# EAGLE board LCMeter-LCD4BitDirect-18F2550-CMP-NoRelay (EAGLE 7.6.0)
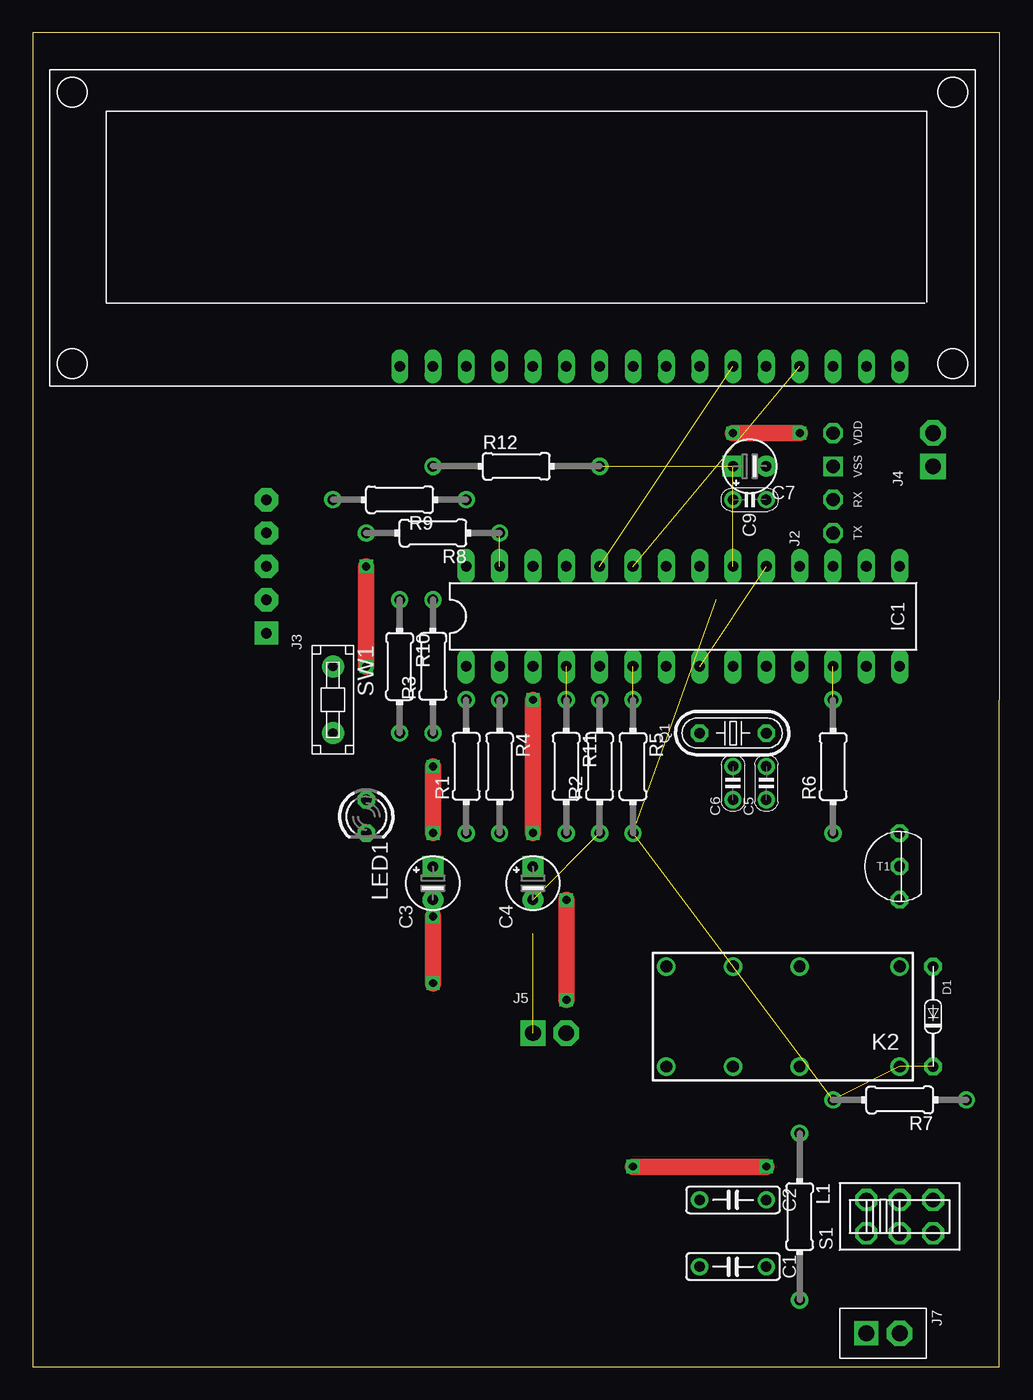
[diagram p0: board, top side]
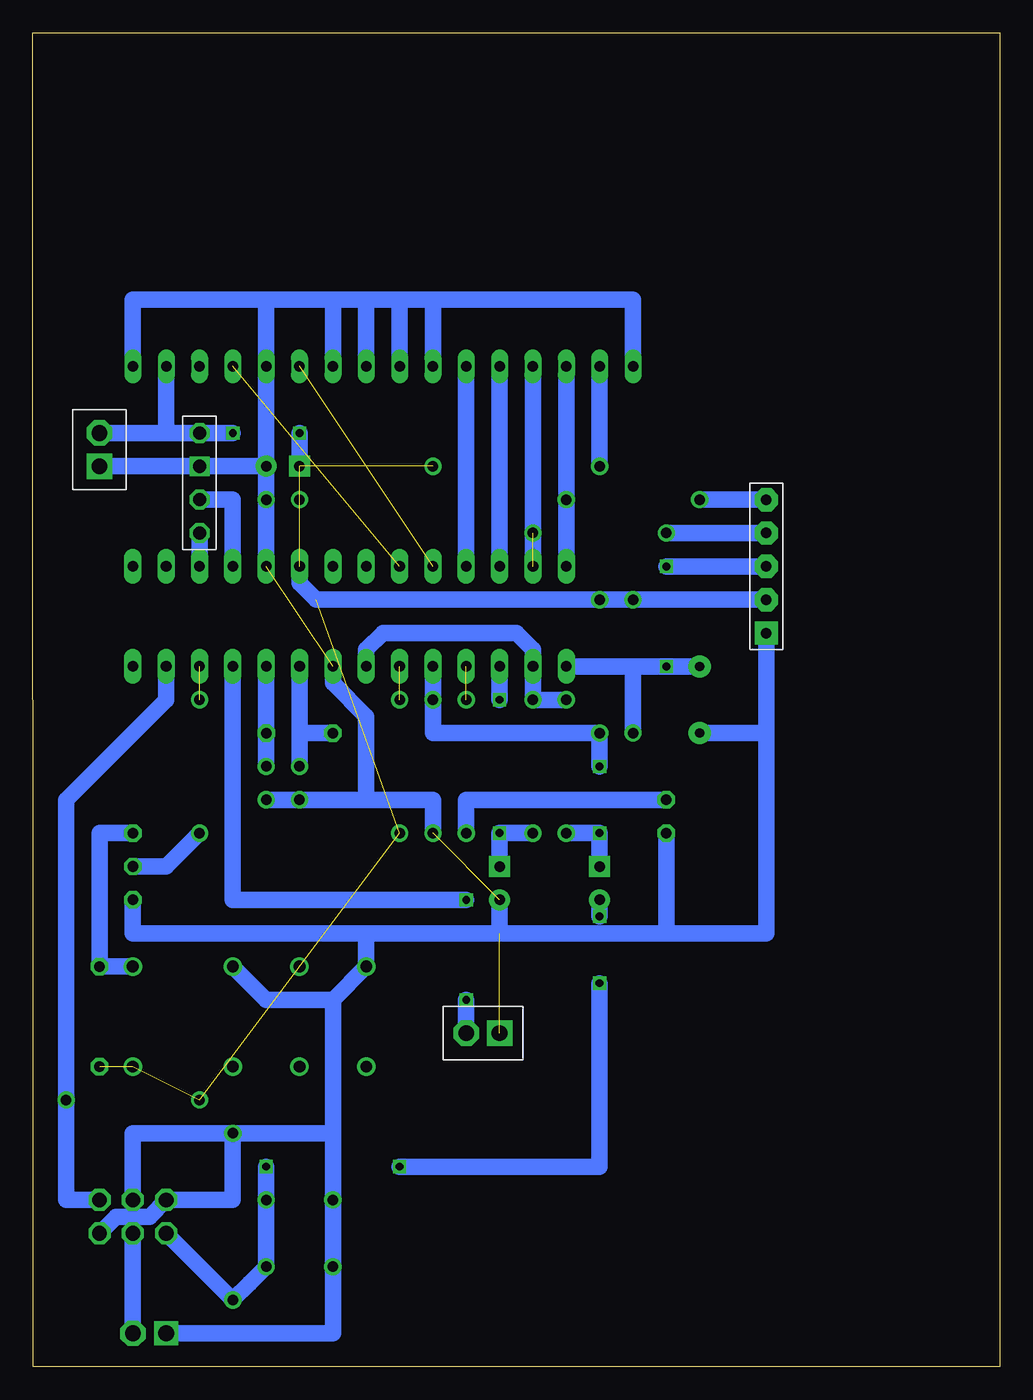
[diagram p1: board, bottom side, seen from below]

Size 73.66 x 101.6 mm. Coordinates in mm from the lower left corner, seen from the top.
Outline: 0,0 73.64,0 73.66,101.6 0,101.6 0,0
Copper layers (1*16): Top 0.035mm / dielectric 1.5mm / Bottom 0.035mm
Design rules "default": minimum track width 10mil, minimum drill 24mil, track to track 8mil, track to pad 8mil, pad to pad 8mil, via to via 8mil, smd to smd 8mil, copper to edge 40mil, drill to drill 8mil, minimum pad ring 10mil, minimum via ring 8mil, stop-mask expansion 4mil, vias tented up to drill 0mil, thermal gap 10mil
Net classes: 0 default: width 0.61 mm

## Footprints (pad centres in the part's own frame; a part is rotated, then mirrored left to right if it is on the bottom)
C050-025X060 = drill 0.8: 1 0,2.54; 2 0,-2.54
E2,5-4 = drill 0.8 pad 1.6 square: + 1.27,0 | drill 0.8 pad 1.6: - -1.27,0
C025-020X036 = drill 0.8: 1 -1.27,0; 2 1.27,0
C025-020X036/V = drill 0.8: 1 0,-1.27; 2 0,1.27
DO34-7 = drill 0.813 octagon: A 3.81,0; C -3.81,0
DIL28-3/V = drill 0.813 long: 1 -3.81,16.51; 2 -3.81,13.97; 3 -3.81,11.43; 4 -3.81,8.89; 5 -3.81,6.35; 6 -3.81,3.81; 7 -3.81,1.27; 8 -3.81,-1.27; 9 -3.81,-3.81; 10 -3.81,-6.35; 11 -3.81,-8.89; 12 -3.81,-11.43; 13 -3.81,-13.97; 14 -3.81,-16.51; 15 3.81,-16.51; 16 3.81,-13.97; 17 3.81,-11.43; 18 3.81,-8.89; 19 3.81,-6.35; 20 3.81,-3.81; 21 3.81,-1.27; 22 3.81,1.27; 23 3.81,3.81; 24 3.81,6.35; 25 3.81,8.89; 26 3.81,11.43; 27 3.81,13.97; 28 3.81,16.51
PIC-UART = drill 1 octagon: 17 0,0; 18 0,2.54; 20 0,7.62 | drill 1 square: 19 0,5.08
PIC-ICSP = drill 0.8 pad 1.778 square: 1 -5.08,0 | drill 0.8 pad 1.778 octagon: 2 -2.54,0; 3 0,0; 4 2.54,0; 5 5.08,0
CONN-2P = drill 1.2 pad 1.93 square: 1 -1.27,0 | drill 1.2 pad 1.93 octagon: 2 1.27,0
CONN-2P-V = drill 1.2 pad 1.778 square: 1 0,-1.27 | drill 1.2 pad 1.93 octagon: 2 0,1.27
DS2Y = drill 0.9: 1 -8.89,-3.81; 4 -1.27,-3.81; 6 3.81,-3.81; 8 8.89,-3.81; 9 8.89,3.81; 11 3.81,3.81; 13 -1.27,3.81; 16 -8.89,3.81
0204/12 = drill 0.8: 1 -6.35,0; 2 6.35,0
LM016L-HD44780 = drill 0.8 long: 1 29.21,-12.7; 2 26.67,-12.7; 3 24.13,-12.7; 4 21.59,-12.7; 5 19.05,-12.7; 6 16.51,-12.7; 7 13.97,-12.7; 8 11.43,-12.7; 9 8.89,-12.7; 10 6.35,-12.7; 11 3.81,-12.7; 12 1.27,-12.7; 13 -1.27,-12.7; 14 -3.81,-12.7; 15 -6.35,-12.7; 16 -8.89,-12.7
LED3MM = drill 0.813 octagon: A -1.27,0; K 1.27,0
HC49 = drill 0.813 octagon: 1 0,-2.54; 2 0,2.54
0204/10 = drill 0.8: 1 -5.08,0; 2 5.08,0
0204/10-V = drill 0.8: 1 0,5.08; 2 0,-5.08
SLSW-2P2T = drill 1.118 pad 1.524 octagon: 1 -1.27,2.54; 2 -1.27,0; 3 -1.27,-2.54; 4 1.27,2.54; 5 1.27,0; 6 1.27,-2.54
PB-1P1T = drill 0.7 pad 1.676: 1 2.54,0; 2 -2.54,0
TO92 = drill 0.813 octagon: 1 -2.54,0; 2 0,0; 3 2.54,0

## Placement (x,y rotation side)
C1  1nF  [C050-025X060]  53.34,7.62 270 top
C2  1nF  [C050-025X060]  53.34,12.7 270 top
C3  10μF  [E2,5-4]  30.48,36.83 90 top
C4  10μF  [E2,5-4]  38.1,36.83 90 top
C5  15pF  [C025-020X036]  55.88,44.45 90 top
C6  15pF  [C025-020X036]  53.34,44.45 90 top
C7  100μF  [E2,5-4]  54.61,68.58 180 top
C9  100nF  [C025-020X036/V]  54.61,66.04 90 top
D1  1N4148  [DO34-7]  68.58,26.67 90 top
IC1  PIC18F2550-I/SP-COMP-B-V  [DIL28-3/V]  49.53,57.15 90 top
J2  PIC-UART  [PIC-UART]  60.96,63.5 0 top
J3  PIC-ICSP  [PIC-ICSP]  17.78,60.96 90 top
J4  PWR  [CONN-2P]  68.58,69.85 90 top
J5  FREQ  [CONN-2P]  39.37,25.4 0 top
J7  TEST-LC  [CONN-2P-V]  64.77,2.54 270 top
K2  DS2Y  [DS2Y]  57.15,26.67 180 top
L1  82μH  [0204/12]  58.42,11.43 270 top
LCD  HD44780LM016L  [LM016L-HD44780]  36.83,88.9 0 top
LED1  TLLG4400  [LED3MM]  25.4,41.91 270 top
Q1  20MHz  [HC49]  53.34,48.26 90 top
R1  100k  [0204/10]  33.02,45.72 90 top
R2  100k  [0204/10]  43.18,45.72 90 top
R3  100k  [0204/10]  30.48,53.34 90 top
R4  47k  [0204/10-V]  35.56,45.72 180 top
R5  4.7k  [0204/10]  45.72,45.72 270 top
R6  10k  [0204/10-V]  60.96,45.72 0 top
R7  10k  [0204/10-V]  66.04,20.32 90 top
R8  100  [0204/10-V]  30.48,63.5 90 top
R9  100  [0204/10-V]  27.94,66.04 90 top
R10  4.7k  [0204/10]  27.94,53.34 270 top
R11  1k  [0204/10-V]  40.64,45.72 180 top
R12  330  [0204/12]  36.83,68.58 0 top
S1  SL-SW-2P-2T  [SLSW-2P2T]  66.04,11.43 90 top
SW1  PB-1P-1T  [PB-1P1T]  22.86,50.8 270 top
T1  2N3904  [TO92]  66.04,38.1 90 top

## Library data of the parts
C1-C7 C9 = c
D1 = d
IC1 = mcu
J2-J5 J7 = pinconn
K2 = relay; MPN: DS2Y-S-DC5V; OC_FARNELL: unknown; OC_NEWARK: 13P3268
L1 R1-R12 = r
LCD = lcd
LED1 = led; MF: VISHAY SEMICONDUCTOR; OC_FARNELL: 1612435
Q1 = q
S1 SW1 = sw
T1 = t

## Nets
/LC: IC1.13 R7.2 S1.6
/MCLR: IC1.1 J3.3 R10.2 SW1.2
/RELAY: IC1.12 R6.1
/RX: IC1.18 J2.18
/TX: IC1.17 J2.17
A0: IC1.2 IC1.7 R1.2 R4.2
A1: C4.+ IC1.3 R4.1
A3: C3.+ IC1.5 R1.1 R2.2 R3.1
A4: IC1.6 R5.1
C2_CON: C2.2 K2.4
D4: IC1.25 LCD.11
D5: IC1.26 LCD.12
D6: IC1.27 LCD.13 R8.2
D7: IC1.28 LCD.14 R9.2
E: IC1.24 LCD.6
FREQ: IC1.11 J5.2
GND: C1.2 C4.- C5.1 C6.1 C7.- C9.1 IC1.8 IC1.19 J2.19 J3.1 J4.1 J5.1 J7.1 K2.8 LCD.1 LCD.5 LCD.7 LCD.8 LCD.9 LCD.10 LCD.16 LED1.K R2.1 S1.5 SW1.1 T1.1
IN+: J7.2 S1.2
N$1: LED1.A R11.1
N$2: C1.1 C2.1 C3.- L1.2 S1.1
N$3: IC1.4 R11.2
N$5: LCD.15 R12.1
N$6: R6.2 T1.2
N$7: L1.1 S1.3 S1.4
N$8: D1.A K2.1 T1.3
OSC1: C6.2 IC1.9 Q1.2
OSC2: C5.2 IC1.10 Q1.1
PGC: J3.4 R8.1
PGD: J3.5 R9.1
RS: IC1.23 LCD.4
VCC: C7.+ C9.2 D1.C IC1.20 J2.20 J3.2 J4.2 K2.16 LCD.2 R3.2 R5.2 R7.1 R10.1 R12.2

## Tracks (layer width: path | path; a pad name or v marks a point on that pad's centre or on a via)
/LC
  Bottom 1.27: IC1.13 63.5,50.8 71.12,43.18 R7.2 71.12,12.7 S1.6
/MCLR  (via drill 0.6)
  Top 1.27: v25.4,53.34 v25.4,60.96
  Bottom 1.27: IC1.1 27.94,53.34 | 27.94,53.34 R10.2 | v25.4,60.96 J3.3 | SW1.2 v25.4,53.34 27.94,53.34
/RELAY  (1 unrouted)
/RX
  Bottom 1.27: IC1.18 58.42,66.04 J2.18
/TX
  Bottom 1.27: J2.17 IC1.17
A0
  Bottom 1.27: IC1.7 48.26,54.61 46.99,55.88 36.83,55.88 35.56,54.61 IC1.2 R4.2 R1.2
A1  (via drill 0.6)
  Top 1.27: v38.1,50.8 v38.1,40.64
  Bottom 1.27: IC1.3 v38.1,50.8 | R4.1 v38.1,40.64 C4.+
A3  (via drill 0.6)
  Top 1.27: v30.48,45.72 v30.48,40.64
  Bottom 1.27: IC1.5 R2.2 43.18,48.26 R3.1 v30.48,45.72 | R1.1 v30.48,40.64 C3.+
A4  (1 unrouted)
C2_CON
  Bottom 1.27: C2.2 50.8,27.94 55.88,27.94 K2.4
D4
  Bottom 1.27: IC1.25 LCD.11
D5
  Bottom 1.27: LCD.12 IC1.26
D6  (1 unrouted)
  Bottom 1.27: IC1.27 LCD.13
D7
  Bottom 1.27: IC1.28 R9.2 LCD.14
E  (1 unrouted)
FREQ  (via drill 0.6)
  Top 1.27: v40.64,35.56 v40.64,27.94
  Bottom 1.27: IC1.11 58.42,35.56 v40.64,35.56 | v40.64,27.94 J5.2
GND  (3 unrouted)
  Bottom 1.27: 17.78,48.26 17.78,33.02 25.4,33.02 | 17.78,48.26 J3.1 | IC1.8 50.8,52.07 48.26,49.53 48.26,43.18 | 48.26,43.18 C6.1 C5.1 | 48.26,33.02 66.04,33.02 T1.1 | 48.26,33.02 38.1,33.02 | R2.1 43.18,43.18 48.26,43.18 | C4.- 38.1,33.02 | 38.1,33.02 25.4,33.02 | 25.4,33.02 LED1.K 25.4,35.56 | SW1.1 17.78,48.26 | C9.1 C7.- J2.19 J4.1 | C9.1 IC1.19 | C9.1 LCD.5 55.88,81.28 | LCD.1 66.04,81.28 55.88,81.28 | 55.88,81.28 50.8,81.28 | LCD.7 50.8,81.28 | 50.8,81.28 48.26,81.28 | LCD.8 48.26,81.28 | 48.26,81.28 45.72,81.28 | 45.72,81.28 LCD.9 | 43.18,81.28 45.72,81.28 | LCD.10 43.18,81.28 | 43.18,81.28 27.94,81.28 LCD.16 | 50.8,17.78 C1.2 50.8,2.54 J7.1 | 50.8,17.78 66.04,17.78 S1.5 | 48.26,33.02 K2.8 50.8,27.94 50.8,17.78
IN+
  Bottom 1.27: J7.2 S1.2
N$1
  Bottom 1.27: LED1.A 40.64,43.18 R11.1
N$2  (via drill 0.6)
  Top 1.27: v55.88,15.24 v45.72,15.24 | v30.48,29.21 v30.48,34.29
  Bottom 1.27: S1.1 L1.2 57.15,6.35 C1.1 | C2.1 C1.1 | C1.1 v55.88,15.24 | v45.72,15.24 30.48,15.24 v30.48,29.21 | v30.48,34.29 C3.-
N$3  (1 unrouted)
N$5
  Bottom 1.27: R12.1 LCD.15
N$6
  Bottom 1.27: T1.2 63.5,38.1 R6.2
N$7
  Bottom 1.27: S1.3 67.31,11.43 64.77,11.43 S1.4 58.42,12.7 L1.1
N$8
  Bottom 1.27: K2.1 D1.A 68.58,40.64 T1.3
OSC1
  Bottom 1.27: IC1.9 53.34,48.26 | 53.34,48.26 Q1.2 | C6.2 53.34,48.26
OSC2
  Bottom 1.27: IC1.10 Q1.1 C5.2
PGC
  Bottom 1.27: R8.1 J3.4
PGD
  Bottom 1.27: J3.5 R9.1
RS  (1 unrouted)
VCC  (via drill 0.6)  (7 unrouted)
  Top 1.27: v53.34,71.12 v58.42,71.12
  Bottom 1.27: IC1.20 53.34,59.69 52.07,58.42 R3.2 R10.1 J3.2 | C7.+ v53.34,71.12 | J2.20 v58.42,71.12 63.5,71.12 | LCD.2 63.5,71.12 | 63.5,71.12 J4.2